# EAGLE board 3 - Input OR Gate Using Transistor (EAGLE 9.7.0)

Size 60.53 x 77.19 mm. Coordinates in mm from the lower left corner, seen from the top.
Outline: 0,0 60.53,0 60.53,77.19 0,77.19 0,0
Copper layers (1*16): Top 0.035mm / dielectric 1.5mm / Bottom 0.035mm
Design rules "default": minimum track width 6mil, minimum drill 0.35mm, track to track 6mil, track to pad 6mil, pad to pad 6mil, via to via 6mil, smd to smd 6mil, copper to edge 40mil, drill to drill 6mil, minimum pad ring 10mil, minimum via ring 8mil, stop-mask expansion 4mil, vias tented up to drill 0mil, thermal gap 10mil

## Footprints (pad centres in the part's own frame; a part is rotated, then mirrored left to right if it is on the bottom)
BATTERY-GENERIC = drill 1.118 pad 3.15 octagon: + 2.54,0; - -2.54,0
LEDRD254W60D565H860B_G = drill 0.981 pad 1.581: 1 -1.27,0; 2 1.27,0
RESAD1016W63L850D250B = drill 0.83 pad 1.43: 1 -5.08,0; 2 5.08,0
SWITCH-SPDT-PTH-8.5X3.7MM = drill 1.016 pad 1.88: 1 -2.54,0; 2 0,0; 3 2.54,0
TO92 = drill 0.813 octagon: 1 -1.27,0; 2 0,1.905; 3 1.27,0

## Placement (x,y rotation side)
BAT_VOLTAGE_SOURCE  9V  [BATTERY-GENERIC]  52.27,8.26 270 top
D1  GREEN  [LEDRD254W60D565H860B_G]  31.55,52.98 0 top
R1  1k  [RESAD1016W63L850D250B]  7.42,47.9 90 top
R2  220  [RESAD1016W63L850D250B]  32.82,68.22 90 top
R3  1k  [RESAD1016W63L850D250B]  27.74,47.9 90 top
R4  1k  [RESAD1016W63L850D250B]  17.58,47.9 90 top
S1  TOGGLE  [SWITCH-SPDT-PTH-8.5X3.7MM]  7.42,35.2 180 top
S2  TOGGLE  [SWITCH-SPDT-PTH-8.5X3.7MM]  17.58,35.2 180 top
S3  TOGGLE  [SWITCH-SPDT-PTH-8.5X3.7MM]  27.74,35.2 180 top
T1  NPN  [TO92]  7.42,63.14 0 top
T2  NPN  [TO92]  17.58,63.14 0 top
T3  NPN  [TO92]  27.74,63.14 0 top

## Library data of the parts
BAT_VOLTAGE_SOURCE R1-R4 S1-S3 = Tinkercad
D1 = Tinkercad; CATEGORY: Opto-Electronic; SUB-CATEGORY: LED; VALUE: LED_GREEN
T1-T3 = Tinkercad; CATEGORY: Transistor; SUB-CATEGORY: BJT; TYPE: NPN

## Nets
BAT_VOLTAGE_SOURCE+: BAT_VOLTAGE_SOURCE.+ S1.3 S2.3 S3.3 T1.1 T2.1 T3.1
BAT_VOLTAGE_SOURCE-: BAT_VOLTAGE_SOURCE.- R2.2
D1_A: D1.1 T1.3 T2.3 T3.3
D1_C: D1.2 R2.1
S1_P: R1.1 S1.2
S2_P: R4.1 S2.2
S3_P: R3.1 S3.2
T1_B: R1.2 T1.2
T2_B: R4.2 T2.2
T3_B: R3.2 T3.2

## Tracks (layer width: path | path; a pad name or v marks a point on that pad's centre or on a via)
BAT_VOLTAGE_SOURCE+  (6 unrouted)
BAT_VOLTAGE_SOURCE-  (1 unrouted)
D1_A  (3 unrouted)
D1_C  (1 unrouted)
S1_P  (1 unrouted)
S2_P  (1 unrouted)
S3_P  (1 unrouted)
T1_B  (1 unrouted)
T2_B  (1 unrouted)
T3_B  (1 unrouted)